# Altium PCB PCB1.PcbDoc
Units mm, origin at the board's own origin, x right, y up, seen from the top; angles counter-clockwise.
Board outline 13.55 x 18.5 mm, 2 copper layers (Top Layer, Bottom Layer); 19 components, 10 nets, 62 pads, 2 vias.
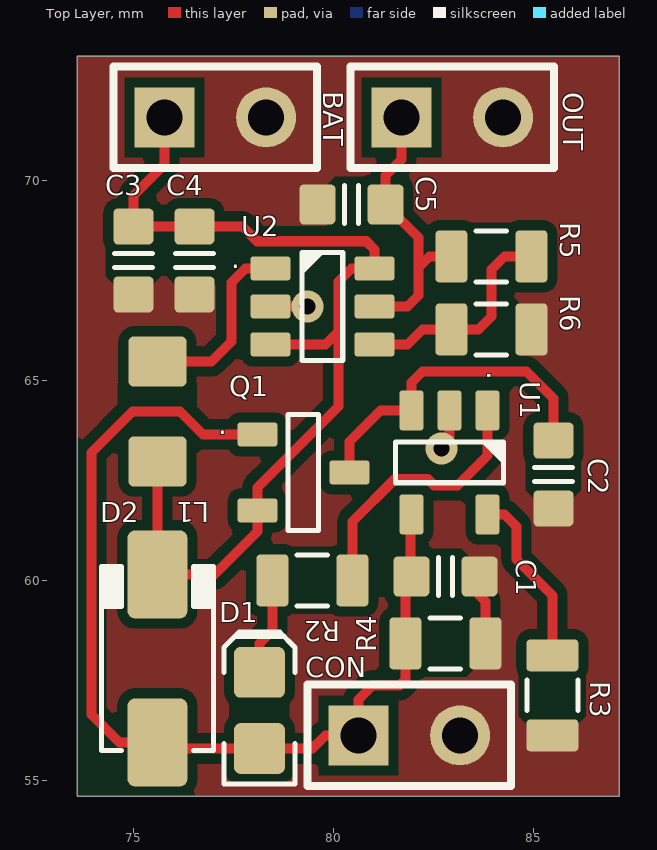
[diagram p0: Top Layer view]
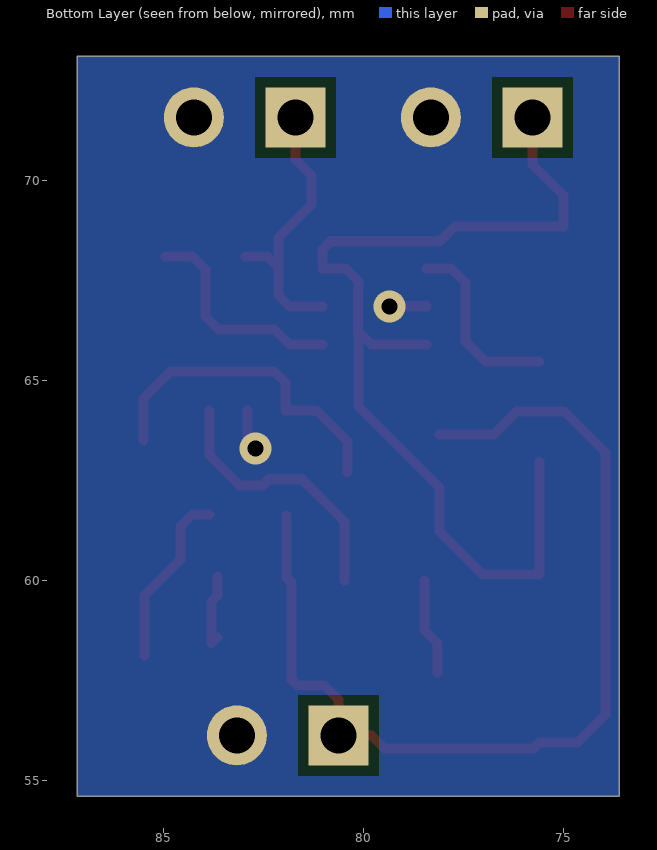
[diagram p1: Bottom Layer view, seen from below]
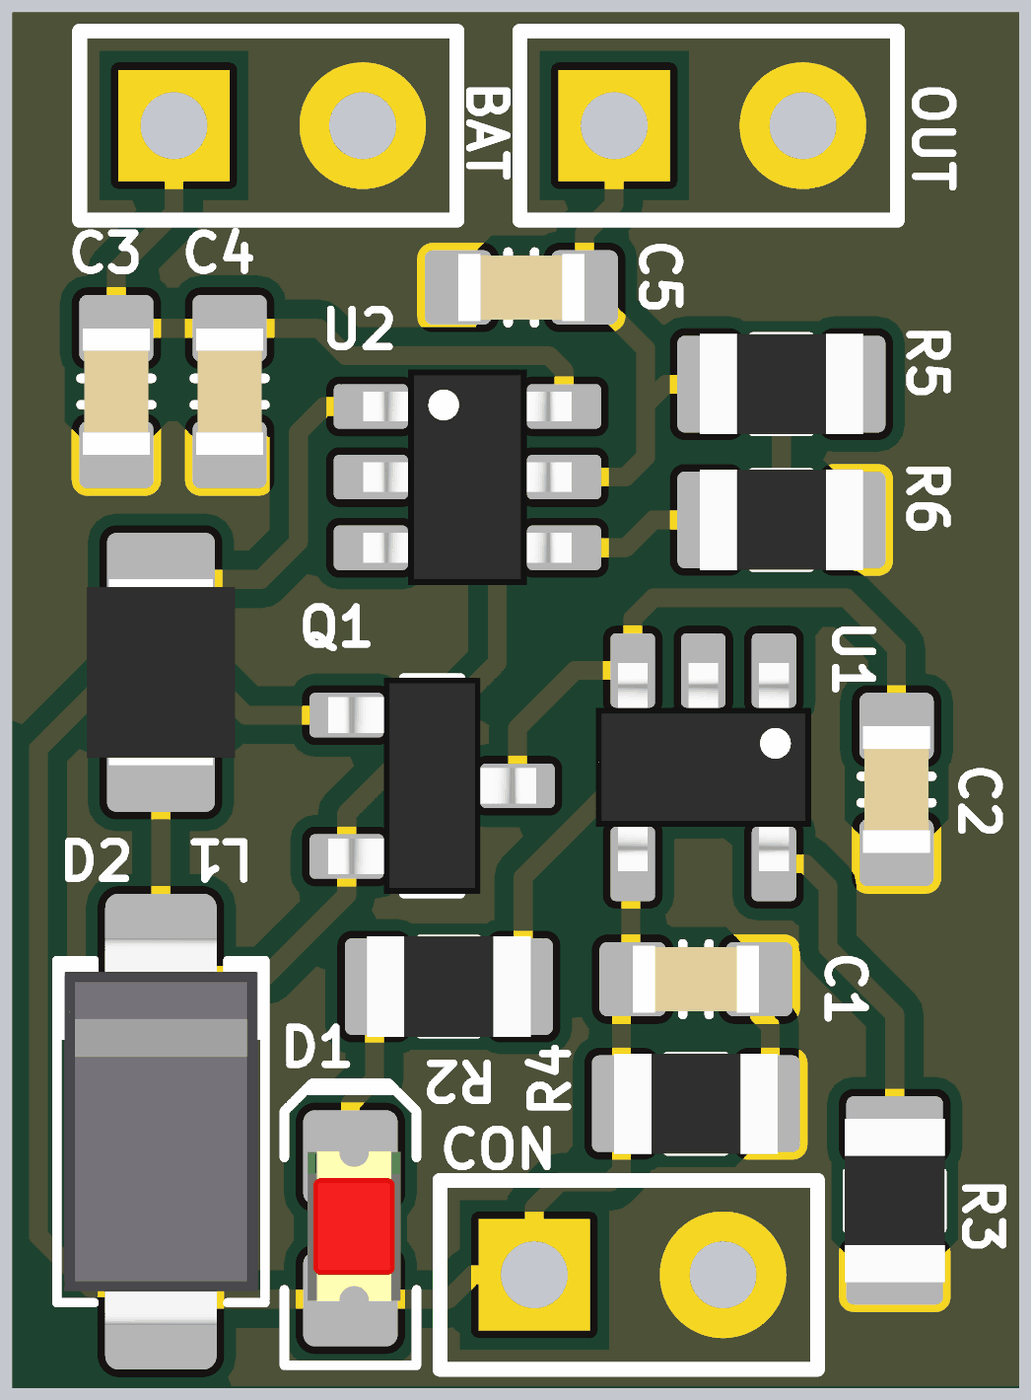
[diagram p2: 3D render of the assembled board from above, using the file's embedded part models]

## Layer stack, top to bottom
Top Solder: solder mask 0.0102, Solder Resist, Dk 3.5
Top Layer: signal copper 0.0356
Dielectric 1: dielectric 0.32, FR-4, Dk 4.8
Bottom Layer: signal copper 0.0356
Bottom Solder: solder mask 0.0102, Solder Resist, Dk 3.5

## Board outline
73.6,54.6 73.6,73.1 87.15,73.1 87.15,54.6

## Design rules (kind name [scope] priority, off if disabled: settings)
Clearance [All] p1: gap=0.254
PolygonConnect PolygonConnect_1 [All vs IsNamedPolygon('BOTTOM Layer-GND') Or  IsNamedPolygon('TOP Layer-GND')] p1: connectstyle=Direct reliefconductorwidth=0.254 reliefentries=4 polygonreliefangle="90 Angle" airgapwidth=0.254
PolygonConnect [All] p2: connectstyle=Relief reliefconductorwidth=0.254 reliefentries=4 polygonreliefangle="90 Angle" airgapwidth=0.254
RoutingVias [All] p1: holewidth=0.711 width=1.27 viastyle="Through Hole" minholewidth=0.711 minwidth=1.27 maxholewidth=0.711 maxwidth=1.27
SolderMaskExpansion [All] p1: expansion=0.102
Width [All] p1: maxlimit=0.254 minlimit=0.254 preferedwidth=0.254
30 further rules are at their usual default settings.

## Components (designator, comment, footprint, x,y, rotation, side; value= is the part's Value field where it differs from the comment)
BAT "BAT" HDR1X2 75.775,71.575 r0 top (schematic designator P102)
C1 "Cap Pol3" CAPC1608X90N 82.8,60.1 r0 top (schematic designator C101)
C2 "Cap" CAPC1608X90N 85.5,62.65 r270 top (schematic designator C102)
C3 "Cap" CAPC1608X90N 75,68 r270 top (schematic designator C103)
C4 "Cap" CAPC1608X90N 76.525,68 r270 top (schematic designator C104)
C5 "Cap" CAPC1608X90N 80.45,69.4 r180 top (schematic designator C105)
CON "Connector" HDR1X2 80.625,56.125 r0 top (schematic designator P101)
D1 "Red" LED-0805-K 78.15,56.75 r90 top (schematic designator D101)
D2 "DIODE_SCHOTTKY_10MQ100NPBF" DO-214AC 75.6,58.05 r90 top (schematic designator D102)
L1 "47u" INDM2520X190N 75.6,64.225 r90 top
OUT "OUT" HDR1X2 81.7,71.575 r0 top (schematic designator P103)
Q1 "MOSFET-P" SOT23-3 79.25,62.7 r0 top (schematic designator Q101)
R2 "Jumper" RESC2012N_ZERO 79.475,60 r0 top (schematic designator R102)
R3 "Jumper" RESC2012N_ZERO 85.475,57.125 r270 top (schematic designator R103)
R4 "Jumper" RESC2012N_ZERO 82.8,58.425 r0 top (schematic designator R104)
R5 "Jumper" RESC2012N_ZERO 83.95,68.1 r0 top (schematic designator R105)
R6 "Jumper" RESC2012N_ZERO 83.95,66.275 r0 top (schematic designator R106)
U1 "*MCP73811T-420I/OT" SOT23-5 82.9,62.95 r270 top (schematic designator U101)
U2 "*MCP1640CT-I/CHY" SOT23-6 79.725,66.85 r0 top (schematic designator U102)

## Footprints (in the part's own frame and the unit in brackets; to place one, negate y for a bottom-side part, rotate by r counter-clockwise, add the part's x,y. Pads: shape width x height; smd on the part's side, far side on the other; paste and mask are expansions set on the pad)
CAPC1608X90N [mm] "Chip Capacitor, Body 1.6x0.8mm, EIA 0603, IPC Medium Density"
  round 0.254 on Mech15: 0(0,0)
  rrect25% 0.9x1 smd: 1(-0.85,0) 2(0.85,0)
  Top Layer pour cut-out: -0.6,0.5 -0.4,0.7 0.4,0.7 0.6,0.5 0.6,-0.5 0.4,-0.7 -0.4,-0.7 -0.6,-0.5
  silkscreen extent -0.18,-0.48 0.18,0.48, body extent -0.85,-0.45 0.85,0.45, height 0.89
DO-214AC [mm] "JEDEC DO214 variation AC. SMA"
  round 0.508 on Mech15: 0(0,0)
  rrect25% 2.2x1.5 smd: A(-2.1,0) K(2.1,0)
  silkscreen extent -2.3,-1.4 2.3,1.4, body extent -2.6,-1.3 2.6,1.3, height 2.42
HDR1X2 [mm] "Connector; Header; 2 Position"
  rect 1.5x1.5 hole 0.9: 1(0,0)
  round 1.5 hole 0.9: 2(2.54,0)
  silkscreen extent -1.27,-1.27 3.81,1.27
INDM2520X190N [mm] "Inductor, molded body 2.5x2.0mm"
  round 0.508 on Mech15: 0(0,0)
  rrect20% 1.25x1.45 smd: 1(-1.25,0) 2(1.25,0)
  Top Layer pour cut-out: -0.7,1 0.7,1 0.7,-1 -0.7,-1
  body extent -1.25,-1 1.25,1, height 1.79
LED-0805-K [mil]
  round 20 on Mech15: 0(0,0)
  rrect25% 50x50 smd: A(-37.5,0) K(37.5,0)
  Top Layer pour cut-out: -15,30 15,30 15,-30 -15,-30
  silkscreen extent -72,-35 77,35, body extent -39,-27 41,25, height 43
RESC2012N_ZERO [mm] "Chip Resistor, Body 2.0x1.2mm, 0805, IPC Medium Density"
  round 0.254 on Mech15: 0(0,0)
  rrect25% 0.8x1.3 smd: 1(-1,0) 2(1,0)
  Top Layer pour cut-out: -0.725,0.65 -0.525,0.85 0.525,0.85 0.725,0.65 0.725,-0.65 0.525,-0.85 -0.525,-0.85 -0.725,-0.65
  silkscreen extent -0.38,-0.64 0.38,0.64, body extent -1.1,-0.67 1.1,0.68, height 0.69
SOT23-3 [mm] "SOT23, 3 pin"
  round 0.5 on Mech15: 0(0,0)
  rrect25% 1x0.6 smd: 1(-1.15,0.95) 2(-1.15,-0.95) 3(1.15,0)
  silkscreen extent -0.38,-1.45 0.38,1.45, body extent -1.4,-1.45 1.4,1.45, height 1.29
SOT23-5 [mm]
  round 0.5 on Mech15: 0(0,0)
  rrect25% 1x0.6 smd: 1(-1.3,0.95) 2(-1.3,0) 3(-1.3,-0.95) 4(1.3,-0.95) 5(1.3,0.95)
  silkscreen extent -0.51,-1.35 0.51,1.35, body extent -1.4,-1.45 1.4,1.45, height 1.44
SOT23-6 [mm]
  round 0.5 on Mech15: 0(0,0)
  rrect25% 1x0.6 smd: 1(-1.3,0.95) 2(-1.3,0) 3(-1.3,-0.95) 4(1.3,-0.95) 5(1.3,0) 6(1.3,0.95)
  silkscreen extent -0.51,-1.35 0.51,1.35, body extent -1.4,-1.45 1.4,1.45, height 1.44

## Part data
BAT CON OUT: library part "Header 2", "Header, 2-Pin"
C1: "Polarized Capacitor (Surface Mount)"
C2 C3 C4 C5: library part "Cap Pol3", "Polarized Capacitor (Surface Mount)"
D1: library part LED_SMD_Green_0805_6mcd, "LED, 0805 SMD, Green"
D2: "Diode Schottky SMD 100V 2A SMA"
L1: library part INDC_47n_1008_1A, "Inductor SMD chip 47nH 1008"
Q1: library part MOSFET_BSS84, "MOSFET SMD P-CH 50V 130mA SOT23-3"
R2 R3 R4 R5 R6: library part RES_0R_0805, "Resistor SMD chip 0.0 Ohm 0.125W 0805"
U1: library part MCP73811T-420I/OT, "MCP73811T-420I/OT"
U2: library part MCP1640CT-I/CHY

## Via types
v1: diameter 0.8, hole 0.4, Top Layer to Bottom Layer, 2 vias

## Nets (pads, with @x,y where several pads share a name; then routed paths per layer and width w, separated by ;. In a path a pad name is that pad's centre, name@x,y a point inside that pad or via, vN(x,y) a via of type N, cw(c..) or ccw(c..) an arc to the next point about the centre after c; other vN are vias at no path point)
BAT+: BAT.1 C3.1 C4.1 D2.K L1.1 Q1.2 U2.3 U2.6 | length 25.5
  Top Layer w0.254: L1.1 D2.K 77.025,60.15 78.1,61.225 Q1.2 78.1,62.325 80.125,64.35 80.125,66.225 ; BAT.1 75.775,70.4 75,69.625 C3.1 C4.1 77.725,68.85 78.094,68.481 80.819,68.481 81.025,68.275 U2.6 80.45,67.8 80.125,67.475 80.125,67.23 80.135,67.22 80.135,66.235 80.125,66.225 ; U2.3 79.8,65.9 80.125,66.225
BAT-: BAT.2 C1.2 C2.2 C3.2 C4.2 C5.2 CON.2 OUT.2 R3.2 R4.2 R6.2 U1.2 U2.2 | length 3.9
  Top Layer w0.254: U2.2 78.428,66.853 v1(79.354,66.853) ; v1(82.704,63.303) 82.704,63.404 82.9,63.6 U1.2 ; R4.2@83.65,58.575 R4.2 83.8,59.475 83.65,59.625 C1.2
NetC102_1: C2.1 Q1.3 U1.3 | length 8.3
  Top Layer w0.254: Q1.3 80.4,63.475 81.175,64.25 U1.3 81.95,64.95 82.225,65.225 84.825,65.225 85.5,64.55 C2.1
NetD101_K: D1.K R2.1 | length 2.4
  Top Layer w0.254: D1.K 78.15,58.425 78.475,58.75 R2.1
NetL1_2: L1.2 U2.1 | length 4.7
  Top Layer w0.254: L1.2 76.95,65.475 77.45,65.975 77.45,67.45 77.8,67.8 U2.1
NetR102_2: R2.2 U1.1 | length 6.8
  Top Layer w0.254: R2.2 80.475,61.475 81.531,62.531 82.364,62.531 82.52,62.375 83.1,62.375 83.85,63.125 U1.1
NetR103_1: R3.1 U1.5 | length 4.4
  Top Layer w0.254: U1.5 84.275,61.65 84.575,61.35 84.575,60.525 85.475,59.625 R3.1
NetR105_2: R5.2 R6.1 U2.4 | length 5.5
  Top Layer w0.254: U2.4 81.85,65.9 82.225,66.275 R6.1 83.625,66.275 83.95,66.6 83.95,67.775 84.275,68.1 R5.2
OUT+: C5.1 OUT.1 R5.1 U2.5 | length 7.1
  Top Layer w0.254: U2.5 81.85,66.85 82.125,67.125 82.125,67.825 ; OUT.1 81.7,70.525 81.3,70.125 C5.1 82.125,68.575 82.125,67.825 ; R5.1 82.4,68.1 82.125,67.825
VCC: C1.1 CON.1 D1.A D2.A Q1.1 R4.1 U1.4 | length 25
  Top Layer w0.254: Q1.1 76.741,63.65 76.166,64.225 74.975,64.225 73.95,63.2 73.95,56.65 74.65,55.95 D2.A 75.753,55.798 D1.A 79.473,55.798 79.8,56.125 CON.1 80.625,57.025 80.975,57.375 81.65,57.375 81.8,57.525 R4.1 81.8,59.95 81.925,60.075 U1.4@81.925,61.625
pads on no net: C1.0 C2.0 C3.0 C4.0 C5.0 D1.0 D2.0 L1.0 Q1.0 R2.0 R3.0 R4.0 R5.0 R6.0 U1.0 U2.0

## Polygon pours and split planes (outlines as drawn)
BAT- on Bottom Layer "BOTTOM Layer-GND" (solid, pour order 12): 73.6,73.1 87.15,73.1 87.15,54.6 73.6,54.6 73.6,73.1
BAT- on Top Layer "TOP Layer-GND" (solid, pour order 8): 73.6,73.125 87.15,73.125 87.15,54.625 73.6,54.625 73.6,73.125

## Silkscreen, mask and mechanical layers (free items; w line width, h text height)
Drill Drawing:
  the board outline again, w0.254